# EAGLE board Drive_Control_Board_REV3 (EAGLE 9.7.0)
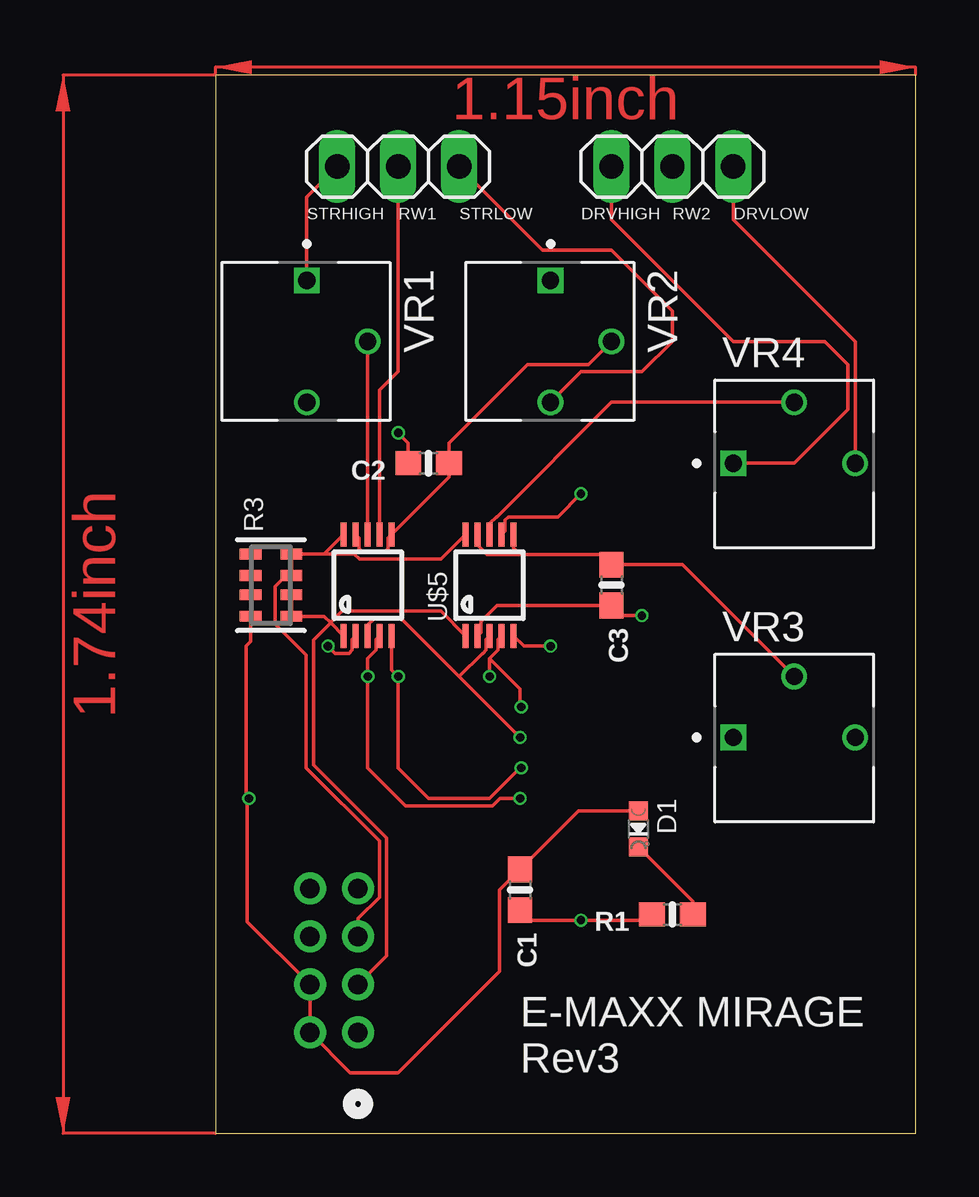
[diagram p0: board, top side]
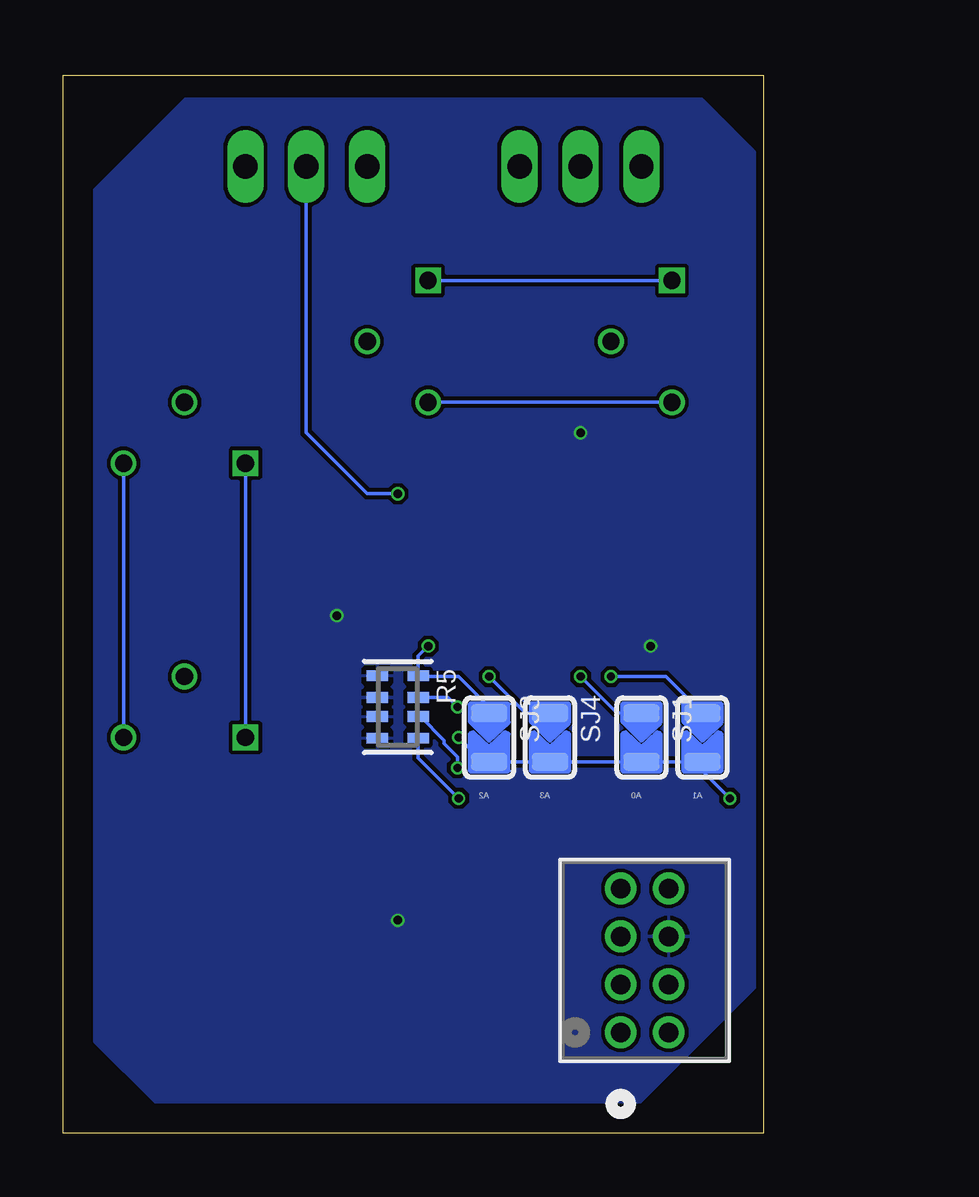
[diagram p1: board, bottom side, seen from below]

Size 29.19 x 44.12 mm. Coordinates in mm from the lower left corner, seen from the top.
Outline: 0,0 29.19,0 29.19,44.12 0,44.12 0,0
Copper layers (1*16): Top / Bottom
Stack-up Default Layer Stack: Top User Defined 0.035mm / Dielectric-1 User Defined 1.5mm / Bottom User Defined 0.035mm
Design rules: minimum copper width 6mil, minimum drill size 0.3mm, copper clearance wire_polygon to wire_polygon 6mil, copper clearance wire_polygon to pad_smd 6mil, copper clearance wire_polygon to via 6mil, copper clearance pad_smd to pad_smd 6mil, copper clearance pad_smd to via 6mil, copper clearance via to via 6mil, copper clearance smd to pad (same net) 0mil, copper clearance smd to via (same net) 0mil, copper clearance smd to smd (same net) 0mil, dimension clearance 0.3mm, via restrict clearance 0mil, restrict clearance 0mil, drill distance 10mil, keepout clearance 0mil

## Footprints (pad centres in the part's own frame; a part is rotated, then mirrored left to right if it is on the bottom)
0603-NO = smd 1.075 x 1: 1 -0.85,0; 2 0.85,0
CHIPLED_0603_NOOUTLINE = smd 0.8 x 0.8: A 0,-0.75; C 0,0.75
CONN8_2314820-8_TEC = drill 0.813 pad 1.321: 1 0,0; 2 2,0; 3 4,0; 4 6,0; 5 0,-2; 6 2,-2; 7 4,-2; 8 6,-2
1X03 = drill 1.016 long: 1 -2.54,0; 2 0,0; 3 2.54,0
RESPACK_4X0603 = smd 0.45 x 0.9: 1 -1.3,-0.85; 2 -0.4,-0.85; 3 0.4,-0.85; 4 1.3,-0.85; 5 1.3,0.85; 6 0.4,0.85; 7 -0.4,0.85; 8 -1.3,0.85
SOLDERJUMPER_ARROW_NOPASTE = smd 0.762 x 1.524: 1 -1.016,0; 2 1.016,0
MSOP10 = smd 0.25 x 1: 1 -1,-2.113; 2 -0.5,-2.113; 3 0,-2.113; 4 0.5,-2.113; 5 1,-2.113; 6 1,2.113; 7 0.5,2.113; 8 0,2.113; 9 -0.5,2.113; 10 -1,2.113
TRIM_3362P-1-104 = drill 0.714 square: 1 -2.54,0 | drill 0.714: 2 0,2.54; 3 2.54,0

## Placement (x,y rotation side)
C1  0.1uF  [0603-NO]  12.7,10.16 270 top
C2  0.1uF  [0603-NO]  8.89,27.94 180 top
C3  0.1uF  [0603-NO]  16.51,22.86 270 top
D1  GREEN  [CHIPLED_0603_NOOUTLINE]  17.63,12.7 180 top
J1  2314820-8CONN8_2314820-8_TEC  [CONN8_2314820-8_TEC]  5.94,4.22 90 bottom
JP3  PINHD-1X3  [1X03]  7.62,40.31 0 top
JP5  PINHD-1X3  [1X03]  19.05,40.31 0 top
R1  10K  [0603-NO]  19.05,9.14 180 top
R3  10K  [RESPACK_4X0603]  2.32,22.86 90 top
R5  10K  [RESPACK_4X0603]  15.24,17.78 270 bottom
SJ1  [SOLDERJUMPER_ARROW_NOPASTE]  5.08,16.51 270 bottom
SJ2  [SOLDERJUMPER_ARROW_NOPASTE]  2.54,16.51 270 bottom
SJ3  [SOLDERJUMPER_ARROW_NOPASTE]  11.43,16.51 270 bottom
SJ4  [SOLDERJUMPER_ARROW_NOPASTE]  8.89,16.51 270 bottom
U$1  DS3502  [MSOP10]  6.35,22.86 0 top
U$5  DS3502  [MSOP10]  11.43,22.86 0 top
VR1  3362P-1-104  [TRIM_3362P-1-104]  3.81,33.02 270 top
VR2  3362P-1-104  [TRIM_3362P-1-104]  13.97,33.02 270 top
VR3  3362P-1-104  [TRIM_3362P-1-104]  24.13,16.51 0 top
VR4  3362P-1-104  [TRIM_3362P-1-104]  24.13,27.94 0 top

## Library data of the parts
C1-C3 D1 R1 R3 R5 U$1 U$5 = microbuilder
J1 = 2024-04-30_22-53-16_Library; COPYRIGHT: Copyright (C) 2024 Ultra Librarian. All rights reserved.; MANUFACTURER_PART_NUMBER: 2314820-8; MFR_NAME: TE Connectivity
JP3 JP5 = Connector; CATEGORY: Headers; DESCRIPTION: Header, Straight, 3 Position; MANUFACTURER: Generic; MPN: Generic; OPERATING_TEMPERATURE: Generic; PART_STATUS: Active; PITCH: 0.100" (2.54mm); ROHS_COMPLIANCE: Generic; SERIES: Generic; SUB-CATEGORY: Headers, Male Pins; TYPE: Board to Board or Cable, Unshrouded, Through Hole, Straight
SJ1-SJ4 = microbuilder; BOM: EXCLUDE
VR1-VR4 = 3362P-1-104; MF: Bourns; MP: 3362P-1-205LF; PARTREV: 08/26/10; STANDARD: Manufacturer Recommendation

## Nets
A0: R5.6 SJ1.1 U$1.5
A1: R5.5 SJ2.1 U$1.4
A2: R5.8 SJ3.1 U$5.5
A3: R5.7 SJ4.1 U$5.4
DRVHIGH: JP5.1 VR3.1 VR4.1
DRVLOW: JP5.3 VR3.3 VR4.3
GND: C1.2 C2.2 C3.2 J1.7 R1.2 R5.1 R5.2 R5.3 R5.4 U$1.2 U$5.2
N$2: D1.C R1.1
RH1: C2.1 U$1.6 U$1.9 VR2.2
RH2: C3.1 U$5.6 U$5.9 VR3.2
RL1: U$1.8 VR1.2
RL2: U$5.8 VR4.2
RW1: JP3.2 U$1.7
RW2: JP5.2 U$5.7
SCL: J1.3 R3.3 R3.4 U$1.10 U$5.10
SDA: J1.2 R3.1 R3.2 U$1.1 U$5.1
STRHIGH: JP3.1 VR1.1 VR2.1
STRLOW: JP3.3 VR1.3 VR2.3
VCC: C1.1 D1.A J1.5 J1.6 R3.5 R3.6 R3.7 R3.8 SJ1.2 SJ2.2 SJ3.2 SJ4.2 U$1.3 U$5.3

## Tracks (layer width: path | path; a pad name or v marks a point on that pad's centre or on a via)
A0  (via drill 0.35)
  Top 0.152: U$1.5 7.35,19.32 v7.62,19.05 7.62,15.24 8.89,13.97 11.43,13.97 12.7,15.24 v12.75,15.24
  Bottom 0.152: v7.62,19.05 6.1,17.53 SJ1.1 | v12.75,15.24 12.75,15.7 13.31,16.26 13.31,16.39 14.29,17.38 R5.6
A1  (via drill 0.35)
  Top 0.152: U$1.4 6.7,20.6 6.7,20.15 6.35,19.8 v6.35,19.05 6.35,15.24 7.93,13.66 11.56,13.66 11.86,13.97 v12.7,13.97
  Bottom 0.152: v6.35,19.05 4.06,19.05 SJ2.1 | v12.7,13.97 14.39,15.66 R5.5
A2  (via drill 0.35)
  Top 0.152: U$5.5 12.86,20.32 v13.97,20.32
  Bottom 0.152: v13.97,20.32 14.39,19.9 R5.8 14.36,19.05 12.7,19.05 11.43,17.78 SJ3.1
A3  (via drill 0.35)
  Top 0.152: U$5.4 11.78,20.6 11.78,20.15 11.43,19.8 | 11.43,19.8 v11.43,19.05 | 11.43,19.8 12.7,18.53 12.7,17.83 v12.75,17.78
  Bottom 0.152: v11.43,19.05 9.91,17.53 SJ4.1 | v12.75,17.78 13.15,18.18 R5.7
DRVHIGH
  Top 0.152: VR4.1 24.13,27.94 26.37,30.18 26.37,32.05 25.4,33.02 21.59,33.02 16.51,38.1 JP5.1
  Bottom 0.152: VR4.1 VR3.1
DRVLOW
  Top 0.152: VR4.3 26.67,33.02 21.59,38.1 JP5.3
  Bottom 0.152: VR4.3 VR3.3
GND  (via drill 0.35)
  Top 0.152: R1.2 17.95,8.89 v15.24,8.89 13.12,8.89 C1.2 | U$5.2 11.08,20.89 11.08,21.34 11.75,22.01 C3.2 16.93,21.59 v17.78,21.59 | U$1.2 5.7,20.6 5.7,20.15 5.57,20.02 5,20.02 v4.69,20.32 | C2.2 8.04,28.79 v7.62,29.21
  pour Bottom: 2.54,43.18 24.13,43.18 27.94,39.37 27.94,3.81 25.4,1.27 5.08,1.27 0,6.35 0,40.64
N$2
  Top 0.152: D1.C 19.9,9.68 R1.1
RH1
  Top 0.152: U$1.9 6,24.83 6,24.38 6.13,24.24 7.07,24.24 7.2,24.38 7.2,24.83 U$1.6 9.74,27.36 C2.1 9.74,28.79 13.01,32.05 15.55,32.05 VR2.2
RH2
  Top 0.152: 12.7,24.13 16.09,24.13 C3.1 19.47,23.71 VR3.2 | 12.7,24.13 11.33,24.13 10.93,24.52 U$5.9 | 12.7,24.13 12.43,24.4 U$5.6
RL1
  Top 0.152: VR1.2 U$1.8
RL2
  Top 0.152: VR4.2 16.51,30.48 11.73,25.7 11.71,25.7 11.43,25.42 U$5.8
RW1
  Top 0.152: U$1.7 6.85,30.98 7.62,31.75 JP3.2
RW2  (via drill 0.35)
  Top 0.152: U$5.7 12.08,25.12 12.08,25.57 12.21,25.7 14.27,25.7 v15.24,26.67
  Bottom 0.152: v15.24,26.67 16.51,26.67 19.05,29.21 JP5.2
SCL
  Top 0.152: 4.54,24.16 R3.4 R3.3 2.94,23.26 2.49,22.81 2.49,21.24 3.78,19.94 3.78,15.24 6.83,12.19 6.83,9.85 5.94,8.96 J1.3 | 4.54,24.16 U$1.10 | 4.54,24.16 5.78,24.16 6,23.94 9.4,23.94 U$5.10
SDA
  Top 0.152: R3.2 R3.1 4.54,21.56 4.79,21.3 | 4.79,21.3 U$1.1 | 4.79,21.3 5.27,21.78 9.4,21.78 U$5.1 | 4.79,21.3 4.79,21.28 4.09,20.57 4.09,15.37 7.14,12.32 7.14,7.41 J1.2
STRHIGH
  Top 0.152: VR1.1 3.81,39.04 JP3.1
  Bottom 0.152: VR1.1 VR2.1
STRLOW
  Top 0.152: VR2.3 15.24,31.75 17.78,31.75 19.05,33.02 19.05,34.29 16.51,36.83 13.64,36.83 JP3.3
  Bottom 0.152: VR1.3 VR2.3
VCC  (via drill 0.35)
  Top 0.152: R3.5 R3.6 R3.7 R3.8 1.47,20.52 1.27,20.32 1.27,14.09 1.33,14.03 | 1.33,14.03 v1.39,13.97 | 10.16,19.05 v12.7,16.51 | U$5.3 11.28,20.6 11.28,20.15 11.15,20.02 11.13,20.02 10.16,19.05 | U$1.3 6.35,21.2 6.63,21.48 7.74,21.48 10.16,19.05 | D1.A 15.14,13.45 C1.1 11.85,10.16 11.85,6.77 7.62,2.54 5.62,2.54 J1.5 J1.6 1.33,8.83 1.33,14.03
  Bottom 0.152: v1.39,13.97 2.54,15.12 SJ2.2 SJ1.2 SJ4.2 SJ3.2 11.68,15.49 v12.7,16.51
(copper drawn outside any net)
  shapes: Top area x2

## Text on the board
NamesTop: STRHIGH | RW1 | STRLOW | DRVHIGH | RW2 | DRVLOW | E-MAXX MIRAGE / Rev3
NamesBottom: A1 | A0 | A3 | A2